# EAGLE board placa_inferior_n (EAGLE 4.09)
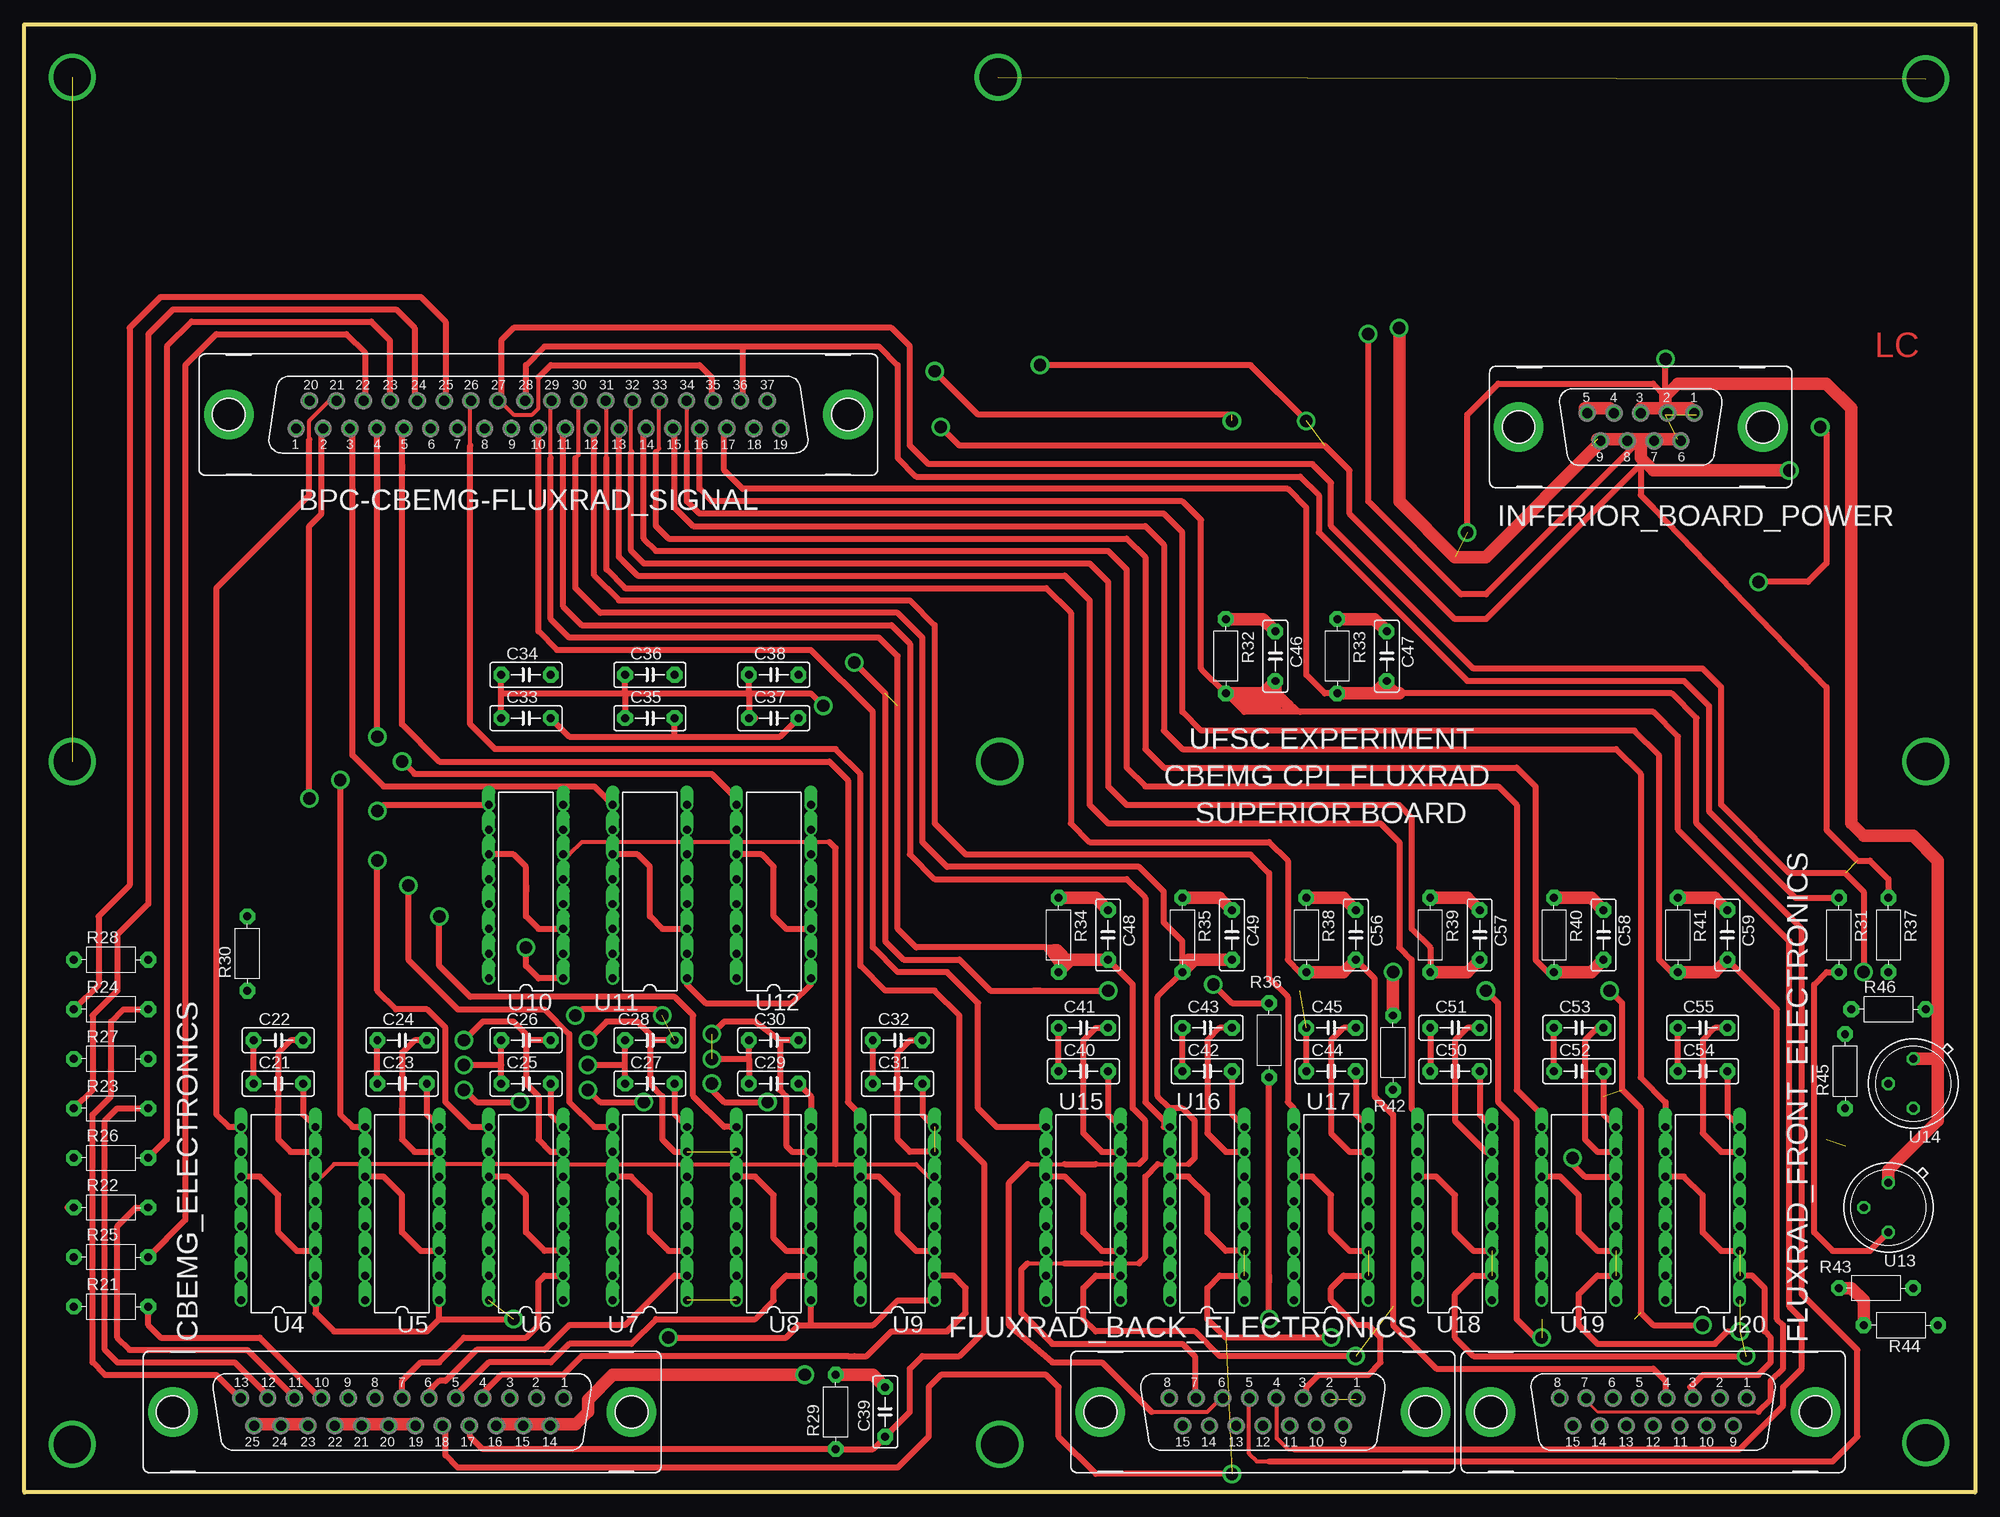
[diagram p0: board, top side]
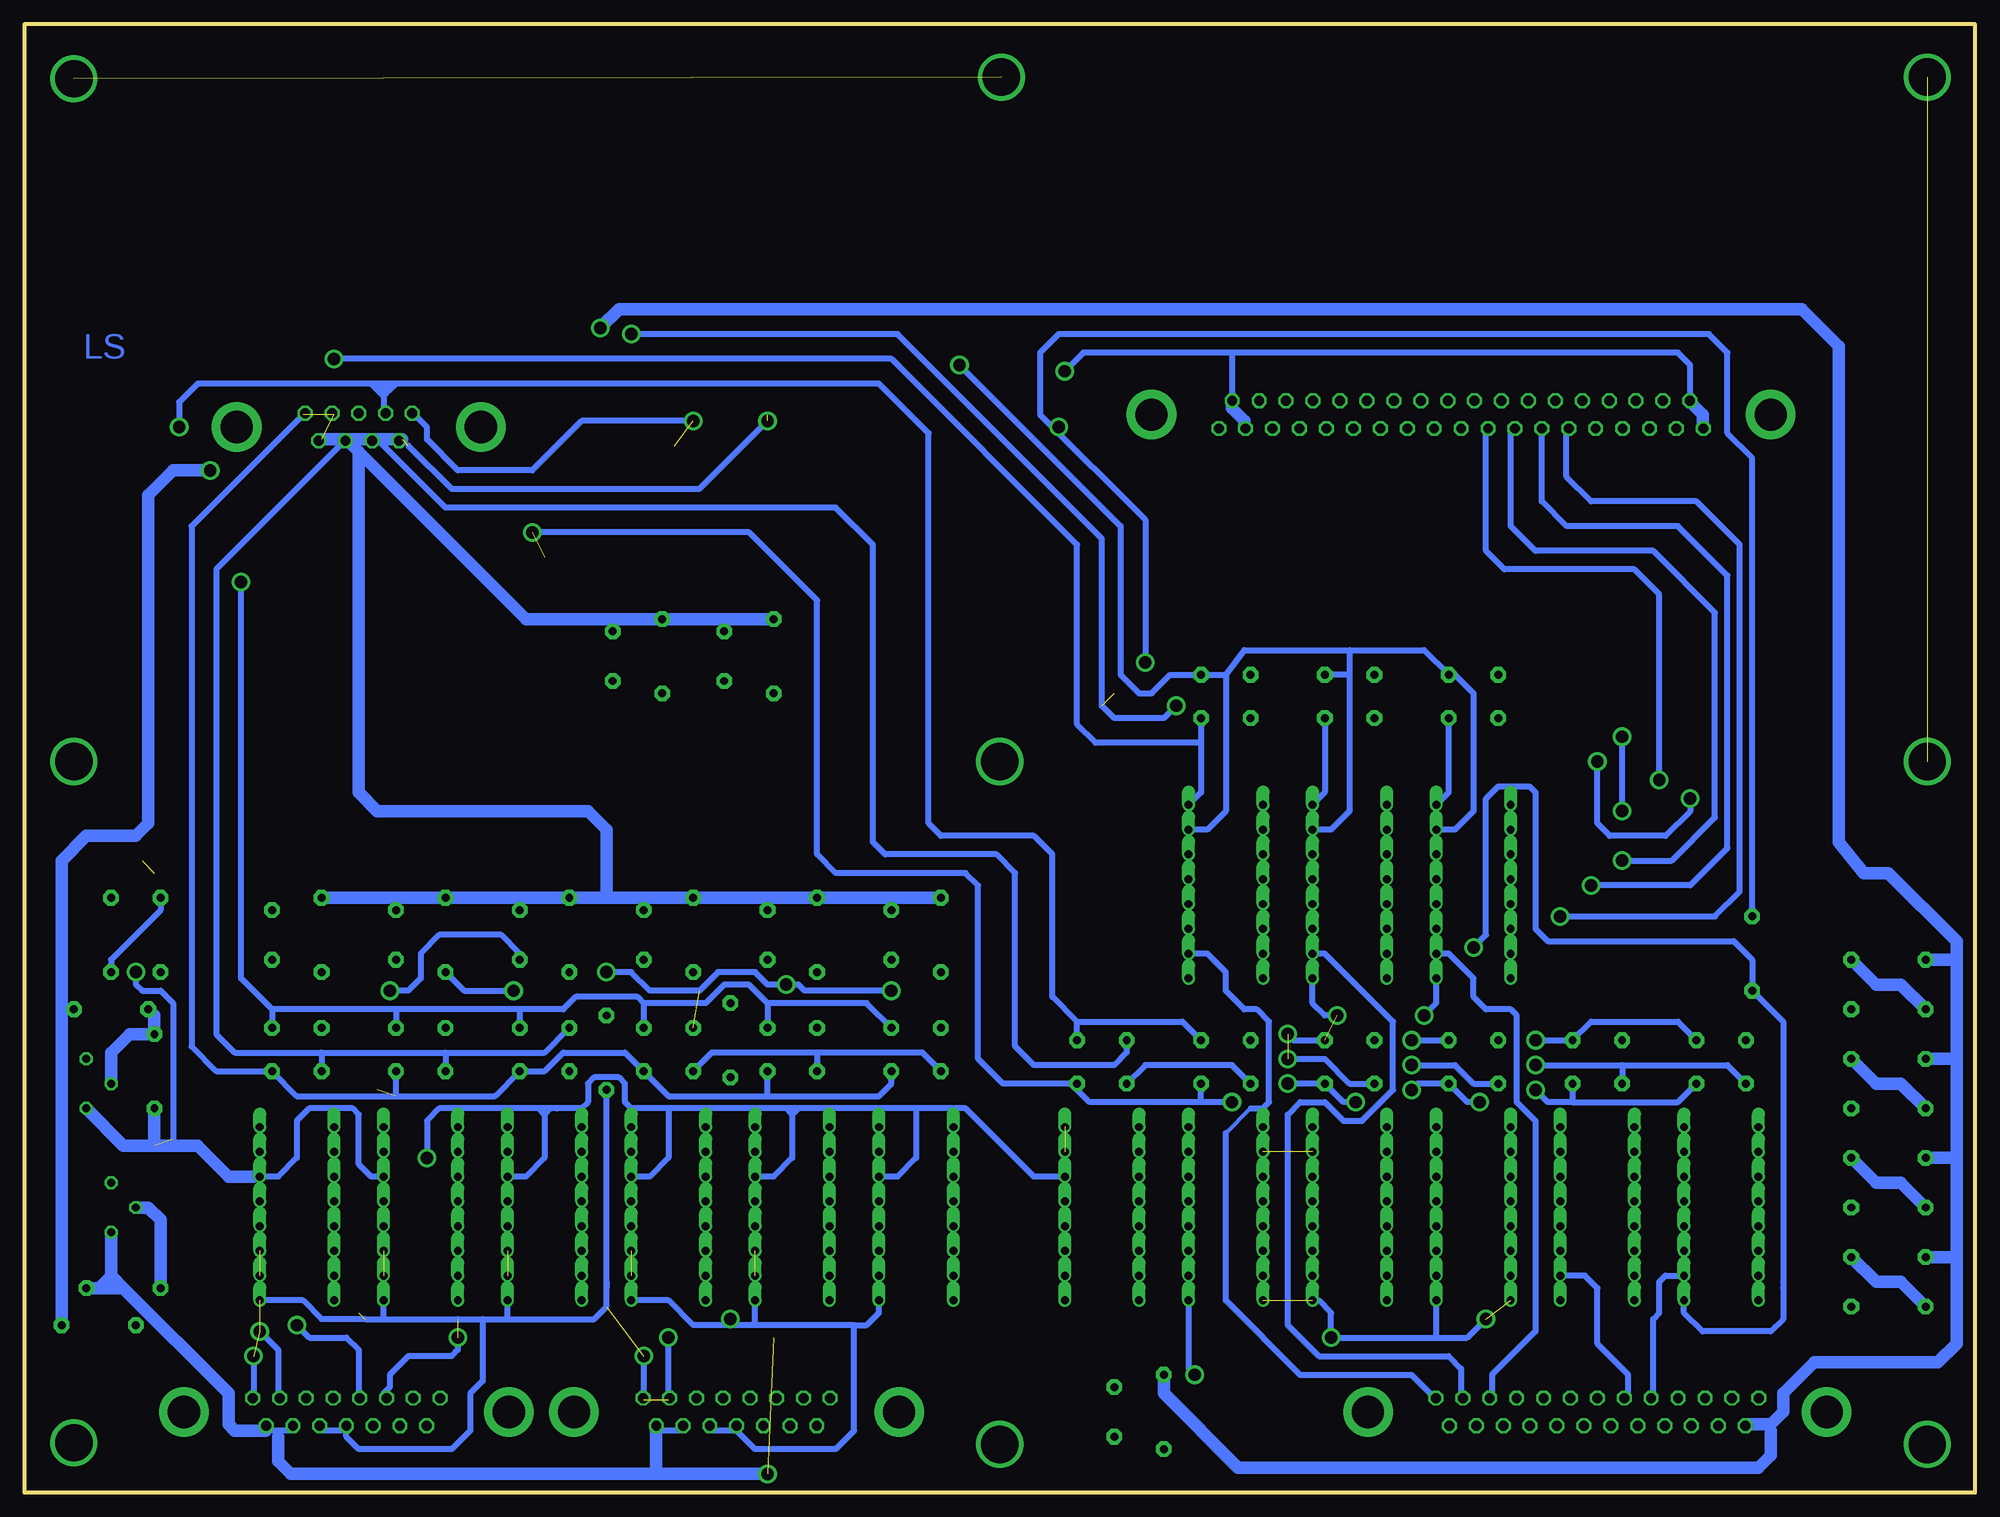
[diagram p1: board, bottom side, seen from below]

Size 200.03 x 150.5 mm. Coordinates in mm from the lower left corner, seen from the top.
Outline: 0,150.5 200.03,150.5 200.03,0 0,0 0,150.5
Copper layers used: Top, Bottom

## Footprints (pad centres in the part's own frame; a part is rotated, then mirrored left to right if it is on the bottom)
F37VP = drill 1.016 octagon: 1 24.841,1.422; 2 22.073,1.422; 3 19.329,1.422; 4 16.561,1.422; 5 13.792,1.422; 6 11.049,1.422; 7 8.28,1.422; 8 5.512,1.422; 9 2.769,1.422; 10 0,1.422; 11 -2.769,1.422; 12 -5.512,1.422; 13 -8.28,1.422; 14 -11.049,1.422; 15 -13.818,1.422; 16 -16.561,1.422; 17 -19.329,1.422; 18 -22.098,1.422; 19 -24.841,1.422; 20 23.47,-1.422; 21 20.701,-1.422; 22 17.932,-1.422; 23 15.189,-1.422; 24 12.421,-1.422; 25 9.652,-1.422; 26 6.909,-1.422; 27 4.14,-1.422; 28 1.372,-1.422; 29 -1.372,-1.422; 30 -4.14,-1.422; 31 -6.909,-1.422; 32 -9.677,-1.422; 33 -12.421,-1.422; 34 -15.189,-1.422; 35 -17.958,-1.422; 36 -20.701,-1.422; 37 -23.47,-1.422 | drill 3.302 pad 5.08 round: G1 -31.75,0; G2 31.75,0
C5B2.5 = drill 0.813 pad 1.6 octagon: 1 -2.54,0; 2 2.54,0
F25VP = drill 1.016 octagon: 1 16.561,1.422; 2 13.792,1.422; 3 11.049,1.422; 4 8.28,1.422; 5 5.512,1.422; 6 2.769,1.422; 7 0,1.422; 8 -2.769,1.422; 9 -5.512,1.422; 10 -8.28,1.422; 11 -11.049,1.422; 12 -13.792,1.422; 13 -16.561,1.422; 14 15.189,-1.422; 15 12.421,-1.422; 16 9.652,-1.422; 17 6.909,-1.422; 18 4.14,-1.422; 19 1.372,-1.422; 20 -1.372,-1.422; 21 -4.14,-1.422; 22 -6.909,-1.422; 23 -9.652,-1.422; 24 -12.421,-1.422; 25 -15.189,-1.422 | drill 3.302 pad 5.08 round: G1 -23.52,0; G2 23.52,0
F15VP = drill 1.016 octagon: 1 9.601,1.422; 2 6.858,1.422; 3 4.115,1.422; 4 1.372,1.422; 5 -1.372,1.422; 6 -4.115,1.422; 7 -6.858,1.422; 8 -9.601,1.422; 9 8.23,-1.422; 10 5.486,-1.422; 11 2.743,-1.422; 12 0,-1.422; 13 -2.743,-1.422; 14 -5.486,-1.422; 15 -8.23,-1.422 | drill 3.302 pad 5.08 round: G1 -16.662,0; G2 16.662,0
F09VP = drill 1.016 octagon: 1 5.486,1.422; 2 2.743,1.422; 3 0,1.422; 4 -2.743,1.422; 5 -5.486,1.422; 6 4.115,-1.422; 7 1.372,-1.422; 8 -1.372,-1.422; 9 -4.115,-1.422 | drill 3.302 pad 5.08 round: G1 -12.522,0; G2 12.522,0
R-7,5 = drill 0.813 pad 1.6 octagon: 1 -3.81,0; 2 3.81,0
DIL16 = drill 0.813 offset: 1 -8.89,-3.81; 2 -6.35,-3.81; 3 -3.81,-3.81; 4 -1.27,-3.81; 5 1.27,-3.81; 6 3.81,-3.81; 7 6.35,-3.81; 8 8.89,-3.81; 9 8.89,3.81; 10 6.35,3.81; 11 3.81,3.81; 12 1.27,3.81; 13 -1.27,3.81; 14 -3.81,3.81; 15 -6.35,3.81; 16 -8.89,3.81
TO39 = drill 0.813 octagon: 1 0,-2.54; 2 2.54,0; 3 0,2.54

## Placement (x,y rotation side)
BPC-CBEMG-FLUXRAD_SIGNAL  [F37VP]  52.7,110.49 180 top
C21  [C5B2.5]  26.03,41.91 0 top
C22  [C5B2.5]  26.03,46.36 0 top
C23  [C5B2.5]  38.73,41.91 0 top
C24  [C5B2.5]  38.73,46.36 0 top
C25  [C5B2.5]  51.44,41.91 0 top
C26  [C5B2.5]  51.44,46.36 0 top
C27  [C5B2.5]  64.13,41.91 0 top
C28  [C5B2.5]  64.13,46.36 0 top
C29  [C5B2.5]  76.84,41.91 0 top
C30  [C5B2.5]  76.84,46.36 0 top
C31  [C5B2.5]  89.53,41.91 0 top
C32  [C5B2.5]  89.53,46.36 0 top
C33  [C5B2.5]  51.44,79.37 0 top
C34  [C5B2.5]  51.44,83.82 0 top
C35  [C5B2.5]  64.13,79.37 0 top
C36  [C5B2.5]  64.13,83.82 0 top
C37  [C5B2.5]  76.84,79.37 0 top
C38  [C5B2.5]  76.84,83.82 0 top
C39  [C5B2.5]  88.26,8.25 90 top
C40  [C5B2.5]  108.59,43.18 0 top
C41  [C5B2.5]  108.59,47.62 0 top
C42  [C5B2.5]  121.28,43.18 0 top
C43  [C5B2.5]  121.28,47.62 0 top
C44  [C5B2.5]  133.98,43.18 0 top
C45  [C5B2.5]  133.98,47.62 0 top
C46  [C5B2.5]  128.27,85.73 270 top
C47  [C5B2.5]  139.7,85.73 270 top
C48  [C5B2.5]  111.12,57.15 270 top
C49  [C5B2.5]  123.82,57.15 270 top
C50  [C5B2.5]  146.69,43.18 0 top
C51  [C5B2.5]  146.69,47.62 0 top
C52  [C5B2.5]  159.38,43.18 0 top
C53  [C5B2.5]  159.38,47.62 0 top
C54  [C5B2.5]  172.09,43.18 0 top
C55  [C5B2.5]  172.09,47.62 0 top
C56  [C5B2.5]  136.53,57.15 270 top
C57  [C5B2.5]  149.22,57.15 270 top
C58  [C5B2.5]  161.92,57.15 270 top
C59  [C5B2.5]  174.62,57.15 270 top
CBEMG_ELECTRONICS  [F25VP]  38.73,8.25 0 top
FLUXRAD_BACK_ELECTRONICS  [F15VP]  127,8.25 0 top
FLUXRAD_FRONT_ELECTRONICS  [F15VP]  167,8.25 0 top
INFERIOR_BOARD_POWER  [F09VP]  165.73,109.22 0 top
R21  [R-7,5]  8.89,19.05 0 top
R22  [R-7,5]  8.89,29.21 0 top
R23  [R-7,5]  8.89,39.37 0 top
R24  [R-7,5]  8.89,49.53 0 top
R25  [R-7,5]  8.89,24.13 0 top
R26  [R-7,5]  8.89,34.29 0 top
R27  [R-7,5]  8.89,44.45 0 top
R28  [R-7,5]  8.89,54.61 0 top
R29  [R-7,5]  83.19,8.25 90 top
R30  [R-7,5]  22.86,55.24 90 top
R31  [R-7,5]  186.06,57.15 270 top
R32  [R-7,5]  123.19,85.73 270 top
R33  [R-7,5]  134.62,85.73 270 top
R34  [R-7,5]  106.04,57.15 270 top
R35  [R-7,5]  118.75,57.15 270 top
R36  [R-7,5]  127.63,46.36 270 top
R37  [R-7,5]  191.14,57.15 270 top
R38  [R-7,5]  131.44,57.15 270 top
R39  [R-7,5]  144.15,57.15 270 top
R40  [R-7,5]  156.84,57.15 270 top
R41  [R-7,5]  169.54,57.15 270 top
R42  [R-7,5]  140.34,45.08 270 top
R43  [R-7,5]  189.86,20.95 180 top
R44  [R-7,5]  192.41,17.14 0 top
R45  [R-7,5]  186.69,43.18 90 top
R46  [R-7,5]  191.14,49.53 0 top
U4  [DIL16]  26.03,28.58 90 top
U5  [DIL16]  38.73,28.58 90 top
U6  [DIL16]  51.44,28.58 90 top
U7  [DIL16]  64.13,28.58 90 top
U8  [DIL16]  76.84,28.58 90 top
U9  [DIL16]  89.53,28.58 90 top
U10  [DIL16]  51.44,61.59 90 top
U11  [DIL16]  64.13,61.59 90 top
U12  [DIL16]  76.84,61.59 90 top
U13  [TO39]  191.14,29.21 180 top
U14  [TO39]  193.67,41.91 180 top
U15  [DIL16]  108.59,28.58 90 top
U16  [DIL16]  121.28,28.58 90 top
U17  [DIL16]  133.98,28.58 90 top
U18  [DIL16]  146.69,28.58 90 top
U19  [DIL16]  159.38,28.58 90 top
U20  [DIL16]  172.09,28.58 90 top

## Library data of the parts
BPC-CBEMG-FLUXRAD_SIGNAL CBEMG_ELECTRONICS FLUXRAD_BACK_ELECTRONICS FLUXRAD_FRONT_ELECTRONICS INFERIOR_BOARD_POWER = con-subd
C21-C59 = capacitor-wima
R21-R46 = discrete
U4-U12 U15-U20 = dil
U13 U14 = linear

## Nets
S$1: U6.1 U7.1 U8.1 U8.16 U9.1
S$3: R25.1 R26.1 R27.1 R28.1
S$4: R23.1 R27.2
S$6: R21.1 R25.2
S$7: R22.1 R26.2
S$8: R24.2
S$10: C39.1 R29.1
S$11: R21.2
S$12: R22.2
S$13: U5.2
S$14: U4.3 U4.11
S$15: U5.3 U5.11
S$17: U5.9 U5.10
S$18: U4.2
S$19: U6.3 U6.11
S$20: U7.3 U7.11
S$21: U8.3 U8.11
S$22: U6.9 U6.10
S$23: C33.2 C35.2 C37.2 U10.8 U11.8 U12.8
S$24: C33.1 C34.1 C35.1 C36.1 C38.1 C40.1 C41.1 C42.1 C43.1 C44.1 C45.1 R30.2 R36.1 R42.1
S$26: U9.3 U9.11
S$27: U12.9 U12.10
S$29: U10.3 U10.11
S$32: R43.2 R44.1 U13.2
S$35: R31.1 R37.2
S$37: U10.9 U10.10
S$38: R31.2
S$39: C58.2 R40.2
S$41: U6.2
S$42: U7.2
S$43: U8.2
S$44: U9.2
S$46: U11.2
S$47: U10.2
S$48: U11.3 U11.11
S$49: U12.3 U12.11
S$56: C57.2 R39.2
S$57: C21.1 C21.2 C22.1 C22.2 C23.1 C23.2 C24.1 C24.2 C25.1 C25.2 C26.1 C26.2 C27.1 C27.2 C28.1 C28.2 C29.1 C29.2 C30.1 C30.2 C31.1 C31.2 C32.1 C32.2 C34.2 C36.2 C38.2 C40.2 C42.2 C44.2 C50.2 C52.2 C54.2 R30.1 R37.1 R42.2 R45.1 U4.1 U4.7 U4.8 U5.1 U5.7 U5.8 U6.7 U6.8 U6.16 U7.7 U7.8 U8.7 U8.8 U8.9 U8.10 U9.7 U9.8 U10.1 U10.7 U11.1 U11.7 U12.1 U12.7 U15.2 U15.8 U16.2 U16.3 U16.8 U16.11 U17.8 U18.1 U18.8 U19.1 U19.8 U20.1 U20.8
S$58: R24.1 R28.2
S$59: U9.9 U9.10
S$60: U11.9 U11.10
S$61: U20.2 U20.3 U20.11
S$62: U12.2
S$63: U16.9 U16.10
S$64: C49.2 R35.2
S$65: U17.9 U17.10
S$66: U4.9 U4.10
S$67: U7.9 U7.10
S$68: C48.2 R34.2
S$70: R45.2 R46.1 U14.2
S$72: U17.2 U17.3 U17.11
S$73: C49.1 R35.1
S$74: C39.2 R29.2
S$78: U15.3 U15.11
S$81: U15.9 U15.10
S$82: R36.2 U15.1 U16.1 U17.1
S$84: U5.6 U6.6 U7.6 U8.6 U9.6 U11.6 U12.6 U15.6 U16.6 U17.6 U18.6
S$86: R43.1
S$95: C41.2 C43.2 C45.2 C51.2 C53.2 C55.2 U15.7 U16.7 U17.7 U19.7 U20.7
S$96: U18.9 U18.10
S$97: U19.6 U20.6
S$99: C56.2 R38.2
S$101: U19.9 U19.10
S$108: U20.9 U20.10
S$109: C46.2 R32.2
S$110: C59.2 R41.2
S$113: C46.1 C47.1 C48.1 C50.1 C51.1 C52.1 C53.1 C54.1 C55.1 C59.1 R32.1 R33.1 R34.1 R41.1
S$117: C47.2 R33.2
S$118: C56.1 R38.1
S$119: C57.1 R39.1
S$120: C58.1 R40.1
S$122: U18.2 U18.3 U18.11
S$123: U19.2 U19.3 U19.11

## Tracks (layer width: path | path; a pad name or v marks a point on that pad's centre or on a via)
S$1  (via drill 1.27)  (1 unrouted)
  Top 0.61: U9.1 89.53,19.69 87,17.14 80.65,17.14 | 80.65,17.14 U8.1 | 80.65,17.14 79.38,17.14 78.1,15.88 v66.04,15.88
  Bottom 0.61: U7.1 67.31,19.69 66.04,18.41 v66.04,15.88 55.24,15.88 | v80.01,12.06 80.65,12.7 U8.1 | 50.16,17.78 52.07,15.88 55.24,15.88 | 55.24,15.88 U6.1
S$2
  Top 0.61: 31.11,109.22 30.48,108.58 30.48,100.33 29.21,99.06 29.21,71.12
S$3
  Bottom 1.27: 23.49,6.98 20.95,6.98 19.69,8.25 19.69,10.16 16.51,13.33 3.81,13.33 1.91,15.24 1.91,24.13 | 1.91,24.13 R25.1 | 1.91,34.29 1.91,24.13 | 1.91,34.29 R26.1 | 1.91,44.45 1.91,34.29 | 1.91,44.45 R27.1 | 1.91,54.61 1.91,44.45 | 1.91,54.61 R28.1 | 140.97,119.38 139.06,121.29 17.78,121.29 13.97,117.48 13.97,66.67 11.43,63.5 8.89,63.5 1.91,56.52 1.91,54.61
S$4
  Top 0.61: 40,112.39 40,119.38 38.1,121.29 15.24,121.29 12.7,118.74 12.7,60.33 9.52,57.15 9.52,51.43 6.98,48.89 6.98,41.27 R23.1
  Bottom 1.27: R27.2 10.16,41.91 7.62,41.91 R23.1
S$5
  Top 0.61: 155.57,15.88 154.94,15.88 153.03,17.78 153.03,38.1 151.13,40.01 151.13,50.17 149.86,51.43
S$6
  Top 0.61: 34.92,112.39 34.92,116.84 33.02,118.74 19.69,118.74 16.51,115.57 16.51,27.94 R25.2
  Bottom 1.27: R25.2 10.16,21.59 7.62,21.59 R21.1
S$7
  Top 0.61: 14.6,46.99 14.6,46.36 | 37.47,112.39 37.47,118.11 35.56,120.02 17.14,120.02 14.6,117.48 14.6,46.99 | R22.1 4.44,29.21 | 14.6,46.99 14.6,36.2 R26.2
  Bottom 1.27: R26.2 10.16,31.75 7.62,31.75 R22.1
S$8
  Top 0.61: R24.2 10.16,49.53 8.89,48.26 8.89,40.64 6.98,38.73 6.98,13.33 8.25,12.06 19.69,12.06 22.22,9.52
S$9
  Top 0.61: 12.06,39.37 9.52,39.37 8.25,38.1 8.25,14.61 9.52,13.33 21.59,13.33 24.77,10.16
S$10
  Top 0.406: 45.72,107.32 45.72,111.76
  Top 0.61: 45.72,6.98 45.72,5.72 46.99,4.44 R29.1 87,4.44 C39.1 90.81,8.25 90.81,12.7 92.07,13.97 95.88,13.97 98.42,16.51 98.42,33.65 95.88,36.2 95.88,48.89 93.34,51.43 88.26,51.43 85.72,53.98 85.72,73.66 83.19,76.2 48.26,76.2 45.72,78.74 45.72,107.32
S$11
  Top 0.61: R21.2 12.7,17.14 13.97,15.88 24.13,15.88 30.48,9.52
S$12
  Top 0.61: R22.2 11.43,29.21 9.52,27.3 9.52,15.88 10.8,14.61 22.86,14.61 27.94,9.52
S$13
  Bottom 0.61: 36.19,9.52 35.56,10.16 35.56,12.06 38.73,15.24 38.73,20.95 40,22.23 U5.2
S$14
  Top 0.61: U4.3 27.94,24.77 26.03,26.67 26.03,30.48 24.13,32.39 U4.11
S$15
  Top 0.61: U5.3 40.64,24.77 38.73,26.67 38.73,30.48 36.83,32.39 U5.11
S$16
  Top 1.27: 48.26,6.98 56.52,6.98 57.78,8.25 57.78,9.52 60.32,12.06 80.01,12.06
S$17  (via drill 1.27)
  Top 0.61: U5.10 U5.9 33.66,37.46 32.38,38.73 v32.38,73.02
  Bottom 0.61: v32.38,73.02 32.38,92.08 34.92,94.61 48.26,94.61 50.16,96.52 50.16,109.22
S$18
  Bottom 0.61: 33.02,9.52 33.02,17.78 32.38,18.41 32.38,21.59 31.75,22.23 U4.2
S$19
  Top 0.61: U6.11 49.53,32.39 51.44,30.48 51.44,26.67 53.34,24.77 U6.3
S$20
  Top 0.61: U7.11 62.23,32.39 64.13,30.48 64.13,26.67 66.04,24.77 U7.3
S$21
  Top 0.61: U8.11 74.93,32.39 76.84,30.48 76.84,26.04 78.1,24.77 U8.3
S$22
  Top 0.61: U6.10 U6.9
S$23
  Top 0.61: C33.2 55.88,77.47 66.67,77.47 | 66.67,77.47 C35.2 | 66.67,77.47 77.47,77.47 C37.2
  Bottom 0.61: C33.2 53.97,71.76 U10.8 | C35.2 66.67,71.76 U11.8 | C37.2 79.38,76.83 | 79.38,76.83 79.38,71.76 U12.8 | 79.38,76.83 90.17,76.83 92.07,78.74 92.07,97.15 111.12,116.2 168.28,116.2
S$24  (via drill 1.27)  (2 unrouted)
  Top 0.61: C40.1 C41.1 | C42.1 C43.1 | C44.1 C45.1 | R36.1 123.82,50.17 v121.92,52.07 | 104.14,51.43 103.5,51.43 | 104.14,51.43 v111.12,51.43 | 104.14,51.43 99.06,51.43 95.88,54.61 90.17,54.61 88.26,56.52 88.26,81.92 v85.09,85.09 | v81.91,80.64 80.65,81.92 74.29,81.92 | 74.93,79.37 74.29,80.01 74.29,81.92 | 74.29,81.92 C38.1 | 61.59,81.92 C35.1 | 61.59,81.92 C36.1 | 61.59,81.92 74.29,81.92 | 48.89,81.92 C34.1 | 48.89,81.92 61.59,81.92 | C33.1 48.89,81.92
  Top 1.27: v140.34,53.34 R42.1
  Bottom 0.61: C40.1 107.95,45.08 118.75,45.08 | 118.75,45.08 C42.1 | 121.28,45.08 121.92,45.08 | 118.75,45.08 121.28,45.08 | 121.28,45.08 129.54,45.08 C44.1 | v140.34,53.34 137.79,53.34 135.89,51.43 130.81,51.43 128.91,53.34 125.09,53.34 123.82,52.07 v121.92,52.07 120.65,52.07 120.01,51.43 v111.12,51.43 | 137.79,118.74 110.49,118.74 89.53,97.79 89.53,80.64 88.26,79.37 83.19,79.37 v81.91,80.64 | v85.09,85.09 85.09,99.7 95.88,110.49 95.88,116.84 93.98,118.74 27.3,118.74 25.4,116.84 25.4,108.58 22.86,106.05 R30.2
S$25
  Bottom 0.61: 174.62,49.53 177.8,52.7 177.8,93.34
S$26
  Top 0.61: U9.11 87.63,32.39 89.53,30.48 89.53,26.67 91.44,24.77 U9.3
S$27  (via drill 1.27 pad 1.68)
  Top 0.61: U12.10 U12.9 73.03,71.12 70.48,73.66 40,73.66 v38.73,74.93
  Bottom 0.61: v38.73,74.93 38.73,68.58 37.47,67.31 31.75,67.31 29.21,69.85 v29.21,71.12
S$28  (via drill 1.27)
  Top 0.61: v36.19,64.77 36.19,51.43 38.1,49.53 41.27,49.53 43.18,47.62 43.18,40.01 45.72,37.46 46.99,37.46
  Bottom 0.61: v36.19,64.77 31.11,64.77 26.67,69.21 26.67,90.17 33.02,96.52 45.08,96.52 47.62,99.06 47.62,108.58 46.99,109.22
S$29
  Top 0.61: U10.3 52.7,57.79 51.44,59.05 51.44,62.23 | U10.11 50.16,65.4 51.44,64.14 51.44,62.23 | 51.44,62.23 51.44,61.59
S$30
  Bottom 1.27: 161.29,107.95 169.54,107.95
S$31  (via drill 3.81)  (1 unrouted)
  other vias: 4.92,74.93 4.92,145.1
S$32
  Top 1.27: R43.2 187.33,20.95 188.59,19.69 R44.1
  Bottom 1.27: U13.2 187.33,29.21 186.06,27.94 R43.2
S$34  (via drill 3.81)  (1 unrouted)
  other vias: 99.85,145.1 194.95,144.94
S$35
  Top 0.61: 73.66,117.48 73.66,112.39 | 73.66,117.48 87.63,117.48 89.53,115.57 89.53,106.05 91.44,104.14 130.81,104.14 132.72,102.23 132.72,98.42 147.95,83.18 170.18,83.18 172.72,80.64 172.72,69.85 181.61,60.96 R31.1 | 73.66,117.48 53.34,117.48 51.44,115.57 51.44,112.39
  Bottom 0.61: R31.1 186.06,59.69 191.14,54.61 R37.2
S$36
  Top 0.406: 48.89,111.76 50.16,110.49 52.07,110.49 52.7,111.12 52.7,114.3
  Top 0.61: 52.7,114.3 53.97,115.57 69.22,115.57 70.48,114.3 70.48,112.39
S$37  (via drill 1.27 pad 1.68)
  Top 0.61: 36.19,104.14 36.19,102.87 | 36.19,104.14 36.19,109.22 | v36.19,77.47 36.19,104.14 | U10.10 U10.9 36.83,70.48 v36.19,69.85
  Bottom 0.61: v36.19,69.85 v36.19,77.47
S$38
  Top 0.61: 191.14,26.67 189.23,24.77 185.42,24.77 183.51,26.67 183.51,52.07 184.78,53.34 R31.2
S$39  (via drill 1.27 pad 1.68)
  Top 0.406: 65.09,111.44 65.09,107 64.77,106.68
  Top 0.61: R40.2 156.21,53.34 154.94,54.61 154.94,72.39 153.03,74.3 116.84,74.3 114.94,76.2 114.94,95.89 113.03,97.79 66.04,97.79 64.77,99.06 64.77,106.68
  Top 1.27: C58.2 160.66,53.34 R40.2
  Bottom 0.61: v149.86,51.43 154.94,51.43 R40.2
S$40
  Top 1.27: 160.02,111.12 162.56,111.12
S$41
  Top 0.61: 38.73,10.16 38.73,11.43 40.64,13.33 42.55,13.33 45.08,15.88 51.44,15.88 52.7,17.14 52.7,21.59 53.34,22.23 U6.2
S$42
  Top 0.61: 41.27,9.52 41.27,10.16 42.55,11.43 43.18,11.43 46.35,14.61 53.34,14.61 55.88,17.14 61.59,17.14 66.67,22.23 U7.2
S$43
  Top 0.61: 44.45,9.52 44.45,10.16 47.62,13.33 53.97,13.33 55.88,15.24 62.23,15.24 64.77,17.78 74.93,17.78 76.84,19.69 76.84,20.95 78.1,22.23 U8.2
S$44
  Top 0.61: 46.99,9.52 46.99,10.16 48.89,12.06 55.24,12.06 57.15,13.97 84.45,13.97 | 84.45,13.97 85.09,13.97 | 84.45,13.97 86.36,13.97 88.9,16.51 94.62,16.51 96.52,18.41 96.52,20.95 95.25,22.23 U9.2
S$45  (via drill 3.81)
  other vias: 194.95,74.93
S$46
  Bottom 0.61: 52.7,9.52 52.7,12.7 53.97,13.97 67.31,13.97 70.48,17.14 70.48,38.73 69.22,40.01 66.67,40.01 64.77,38.1 62.87,38.1 59.69,41.27 59.69,48.26 66.67,55.24 U11.2
S$47
  Bottom 0.61: 49.53,9.52 49.53,12.06 45.08,16.51 45.08,38.1 46.99,40.01 46.99,48.89 47.62,49.53 50.16,49.53 51.44,50.8 51.44,52.7 53.97,55.24 U10.2
S$48
  Top 0.61: U11.11 62.87,65.4 64.13,64.14 64.13,59.05 65.41,57.79 U11.3
S$49
  Top 0.61: U12.11 75.56,65.4 76.84,64.14 76.84,59.05 78.1,57.79 U12.3
S$50  (via drill 3.81)
  other vias: 194.95,5.08
S$51  (via drill 3.81)
  other vias: 100.01,74.93
S$52  (via drill 3.81)
  other vias: 100.01,4.92
S$53  (via drill 3.81)
  other vias: 4.92,4.92
S$54
  Bottom 1.27: 29.21,111.76 27.94,110.49 27.94,109.22
S$55
  Bottom 0.61: 93.34,114.93 91.44,116.84 76.2,116.84 | 76.2,116.84 76.2,111.76 | 76.2,116.84 30.48,116.84 29.21,115.57 29.21,112.39
  Bottom 1.27: 74.93,109.22 74.93,109.86 76.2,111.12 76.2,111.76
S$56  (via drill 1.27 pad 1.68)
  Top 0.406: 62.23,106.68 62.23,111.76
  Top 0.61: C57.2 149.22,53.98 | R39.2 144.15,55.88 142.24,57.79 142.24,69.21 140.97,70.48 113.03,70.48 111.12,72.39 111.12,93.34 109.22,95.25 63.5,95.25 62.23,96.52 62.23,106.68
  Top 1.27: C57.2 147.95,53.34 R39.2
  Bottom 0.61: v162.56,51.43 160.66,51.43 159.38,52.7 159.38,55.24 157.48,57.15 151.13,57.15 149.22,55.24 C57.2
S$57  (via drill 1.27, 1.27 pad 1.42)  (22 unrouted)
  Top 0.61: 43.18,6.35 43.18,3.81 44.45,2.54 89.53,2.54 92.71,5.72 92.71,10.8 93.98,12.06 104.78,12.06 106.04,10.8 106.04,5.72 109.85,1.91 v123.82,1.91 | 42.55,17.78 U5.1 | 42.55,17.78 v50.16,17.78 | U16.11 119.38,32.39 121.28,30.48 121.28,26.67 123.19,24.77 U16.3 | 42.55,17.78 41.27,16.51 31.75,16.51 29.84,18.41 U4.1 | U16.2 122.56,22.23 121.28,20.95 121.28,19.69 | 121.28,19.69 121.28,20.32 | U15.2 109.85,22.23 108.59,20.95 108.59,17.78 109.85,16.51 120.01,16.51 122.56,13.97 v136.53,13.97 | 121.28,19.69 121.28,17.78 123.19,15.88 v133.98,15.88 | U4.7 27.3,34.92 26.03,36.2 26.03,38.73 | 26.03,38.73 26.03,39.37 | 48.89,112.39 48.89,118.11 50.16,119.38 88.9,119.38 90.81,117.48 90.81,107.32 92.71,105.41 132.08,105.41 133.98,103.51 133.98,99.06 148.59,84.45 172.09,84.45 173.99,82.55 173.99,70.48 180.97,63.5 186.69,63.5 188.59,61.59 v188.59,53.34 | U15.8 111.12,38.73 C40.2 | 26.03,38.73 26.03,45.08 27.3,46.36 C22.2 | U5.7 40,34.92 38.73,36.2 38.73,38.73 | U16.8 123.82,38.73 C42.2 | 38.73,38.73 38.73,39.37 | v42.55,59.05 42.55,53.98 45.72,50.8 66.67,50.8 68.58,48.89 68.58,40.64 71.75,37.46 U8.9 | 38.73,38.73 38.73,45.08 40,46.36 C24.2 | C21.1 C22.1 | U17.8 136.53,38.73 C44.2 | C23.1 C24.1 | U6.7 53.97,34.92 52.7,36.2 52.7,40.64 51.44,41.91 51.44,46.36 | v45.08,46.36 46.99,48.26 50.16,48.26 51.44,46.99 51.44,46.36 | v172.09,17.14 167,17.14 165.73,18.41 165.73,39.37 163.83,41.27 163.83,50.17 162.56,51.43 | U8.9 72.39,37.46 | v51.44,55.88 51.44,53.98 52.7,52.7 U10.1 | U12.1 80.65,52.07 78.74,50.17 69.85,50.17 67.94,52.07 U11.1 | 48.89,43.82 C26.1 | 48.89,43.82 v45.08,43.82 | U18.8 149.22,38.73 C50.2
  Top 0.61: U19.8 161.92,38.73 C52.2 | C25.1 48.89,43.82 | U8.10 U8.9 | v177.8,93.34 182.88,93.34 184.78,95.25 184.78,108.58 v184.15,109.22 | C26.2 51.44,46.36 | v104.14,115.57 125.73,115.57 v131.44,109.86 | R37.1 191.14,62.86 189.23,64.77 187.96,64.77 184.78,67.95 184.78,82.55 167,100.96 165.73,102.23 165.73,105.41 | U7.7 66.67,34.92 65.41,36.2 65.41,40.64 64.13,41.91 64.13,46.36 | v57.78,46.36 59.69,48.26 62.87,48.26 64.13,46.99 64.13,46.36 | C31.1 C32.1 | U20.8 174.62,38.73 C54.2 | v93.98,109.22 95.88,107.32 133.35,107.32 135.89,104.77 135.89,100.33 146.69,89.54 149.86,89.54 165.73,105.41 | 61.59,43.82 C28.1 | 61.59,43.82 v57.78,43.82 | v56.52,48.89 57.15,49.53 64.77,49.53 v65.41,48.89 | C27.1 61.59,43.82 | v93.34,114.93 97.79,110.49 123.82,110.49 | C28.2 64.13,46.36 | 74.29,44.45 C29.1 | 74.29,44.45 C30.1 | v137.79,118.74 137.79,101.6 147.32,92.08 149.86,92.08 165.73,107.95 | U8.7 78.74,34.92 78.1,35.56 78.1,40.64 77.47,41.27 77.47,46.36 | v70.48,44.45 74.29,44.45 | 168.28,110.49 v168.28,116.2 | 165.73,106.05 165.73,105.41 | v70.48,46.99 71.75,48.26 74.93,48.26 77.47,46.36 | 168.28,112.39 167,113.67 151.13,113.67 147.95,110.49 v147.95,98.42 | C30.2 77.47,46.36 | C32.2 90.81,46.36 89.53,45.08 89.53,36.2 90.81,34.92 U9.7 | U9.8 92.07,38.73 C31.2 | U8.8 80.65,40.64 C29.2 | v76.2,40.01 71.75,40.01 70.48,41.27 v70.48,41.91 | U7.8 66.67,38.73 C27.2 | v63.5,40.01 59.06,40.01 v57.78,41.27 | U6.8 53.97,38.73 C25.2 | v50.8,40.01 46.35,40.01 v45.08,41.27 | U4.8 28.58,38.73 C21.2 | C23.2 41.27,38.73 U5.8
  Top 1.27: 191.14,31.75 191.14,33.02 196.22,38.1 196.22,44.45 | 196.22,44.45 193.67,44.45 | 196.22,44.45 196.22,64.77 193.67,67.31 188.59,67.31 187.33,68.58 187.33,111.12 184.78,113.67 169.54,113.67 168.28,112.39 168.28,111.12 | v180.97,104.77 167,104.77 165.73,106.05 165.73,107.95 | 168.28,111.12 165.73,111.12 | 168.28,111.12 170.81,111.12 | 165.73,107.95 169.54,107.95 | 161.92,107.95 165.73,107.95 | 161.92,107.95 161.29,107.95 | 161.92,107.95 149.86,95.89 146.69,95.89 140.97,101.6 v140.97,119.38
  Bottom 0.61: U4.1 29.84,18.41 27.94,16.51 20.95,16.51 19.69,17.78 19.69,21.59 | U10.7 53.34,67.95 51.44,69.85 51.44,81.92 53.34,83.82 C34.2 56.52,86.36 64.13,86.36 | 19.69,21.59 19.69,20.95 | 41.91,108.58 41.91,104.14 39.37,101.6 28.58,101.6 24.13,97.15 24.13,61.59 26.67,59.05 v42.55,59.05 | 19.69,21.59 19.69,48.26 R30.1 22.86,54.61 24.77,56.52 43.81,56.52 45.08,57.79 45.08,71.76 45.72,72.39 48.89,72.39 50.16,71.12 50.16,57.15 v51.44,55.88 | 169.54,6.35 167.64,6.35 167,6.98 167,5.72 165.73,4.44 156.21,4.44 154.31,6.35 154.31,10.16 153.03,11.43 153.03,17.78 | 133.98,9.52 v133.98,15.88 | U11.7 66.04,67.95 64.13,69.85 64.13,83.82 | 163.19,10.16 162.56,10.8 162.56,12.06 160.66,13.97 156.21,13.97 155.57,14.61 v155.57,15.88 | 163.83,107.95 156.84,100.96 116.84,100.96 113.03,97.15 113.03,66.67 111.76,65.4 100.33,65.4 98.42,63.5 98.42,45.72 96.52,43.82 88.26,43.82 87,45.08 C32.1 | v136.53,13.97 136.53,9.52 | 140.34,21.59 140.34,20.95 | 140.34,21.59 R42.2 | 64.13,83.82 C36.2 | U12.7 78.74,67.95 76.84,69.85 76.84,83.82 | 64.13,86.36 64.13,83.82 | C40.2 111.12,41.91 112.4,40.64 123.82,40.64 | 140.34,21.59 140.34,19.05 141.6,17.78 150.5,17.78 | C22.2 30.48,48.26 39.37,48.26 C24.2 v45.08,46.36 | v176.53,13.97 176.53,9.52 | 173.99,10.16 173.99,14.61 v175.9,16.51 | 64.13,86.36 74.93,86.36 76.84,83.82 | 123.82,40.64 C42.2 | 150.5,17.78 U18.1 | 165.73,9.52 165.73,14.61 167,15.88 170.81,15.88 v172.09,17.14 | 153.03,17.78 150.5,17.78 | 123.82,40.64 133.98,40.64 C44.2 138.43,45.08 144.78,45.08 146.69,43.18 C50.2 151.76,40.64 161.92,40.64 | 76.84,83.82 C38.2 82.55,83.82 84.45,81.92 85.72,81.92 87.63,83.82 87.63,99.06 v104.14,115.57
  Bottom 0.61: 153.03,17.78 155.57,17.78 163.19,17.78 | U20.1 171.45,19.69 169.54,17.78 165.1,17.78 163.19,17.78 | C21.1 25.4,43.82 36.19,43.82 | 36.19,43.82 C23.1 | 163.19,17.78 U19.1 | 184.78,36.2 184.78,50.17 186.06,51.43 187.96,51.43 188.59,52.07 v188.59,53.34 | 160.02,110.49 158.75,109.22 158.75,107.95 155.57,104.77 147.95,104.77 142.88,109.86 v131.44,109.86 | v45.08,43.82 36.19,43.82 | C25.1 51.44,41.91 53.34,43.82 v57.78,43.82 | 161.92,40.64 C52.2 | U10.1 55.24,50.17 v56.52,48.89 | v57.78,46.36 C26.2 | 161.92,40.64 172.09,40.64 C54.2 180.34,43.18 182.88,45.72 182.88,99.06 171.45,110.49 | C31.1 85.09,43.82 76.2,43.82 C29.1 | U11.1 67.94,50.17 66.67,48.89 v65.41,48.89 | v184.15,109.22 184.15,111.76 182.25,113.67 164.47,113.67 | 163.19,112.39 163.19,111.12 | 163.83,113.03 163.19,112.39 | C27.1 64.13,41.91 66.67,44.45 v70.48,44.45 | 164.47,113.67 163.83,113.03 | 162.56,113.03 163.19,112.39 | 162.56,113.03 163.83,113.03 | 161.92,113.67 162.56,113.03 | 161.92,113.67 164.47,113.67 | v123.82,109.86 130.81,102.87 156.21,102.87 160.66,107.32 | C28.2 69.85,46.36 v70.48,46.99 | 161.92,113.67 112.4,113.67 107.31,108.58 107.31,68.58 106.04,67.31 96.52,67.31 94.62,65.4 94.62,50.8 92.07,48.26 | C30.2 81.28,48.26 92.07,48.26 | v147.95,98.42 125.73,98.42 118.75,91.44 118.75,65.4 116.84,63.5 103.5,63.5 102.23,62.23 102.23,44.45 99.69,41.91 C31.2 92.07,41.27 90.81,40.01 79.38,40.01 | C32.2 92.07,48.26 | 79.38,40.01 C29.2 | v76.2,40.01 79.38,40.01 | v70.48,41.91 C27.2 64.77,40.01 v63.5,40.01 | v57.78,41.27 57.15,41.91 C25.2 52.07,40.01 v50.8,40.01 | v45.08,41.27 43.81,40.01 41.27,40.01 | C21.2 30.48,40.01 41.27,40.01
  Bottom 0.61: C23.2 41.27,40.01
  Bottom 1.27: v123.82,1.91 135.25,1.91 | 176.53,32.39 179.07,32.39 182.25,35.56 186.69,35.56 | 193.67,39.37 189.86,35.56 186.69,35.56 | 186.69,35.56 R45.1 | 196.22,49.53 194.95,49.53 | 196.22,49.53 196.22,17.78 | 196.22,49.53 196.22,64.77 193.67,67.31 188.59,67.31 187.33,68.58 187.33,102.23 184.78,104.77 v180.97,104.77
S$58
  Top 0.61: 43.18,112.39 43.18,120.02 40.64,122.55 13.97,122.55 10.8,119.38 10.8,62.23 7.62,59.05 7.62,52.07 R24.1
  Bottom 1.27: R28.2 10.16,52.07 7.62,52.07 R24.1
S$59
  Top 0.61: 38.73,105.41 38.73,104.77 | 38.73,105.41 38.73,109.22 | U9.10 U9.9 85.72,38.73 84.45,40.01 84.45,73.02 82.55,74.93 42.55,74.93 38.73,78.74 38.73,105.41
S$60
  Top 0.61: U11.10 U11.9 58.42,72.39 36.83,72.39 33.66,75.57 33.66,102.87 | 33.66,102.87 33.66,102.23 | 33.66,102.87 33.66,108.58
S$61  (1 unrouted)
  Top 0.61: 171.45,10.16 170.81,10.8 172.09,12.06 177.8,12.06 179.07,13.33 179.07,15.88 178.44,16.51 178.44,20.95 177.16,22.23 U20.2 | U20.3 173.99,24.77 172.09,26.67 172.09,30.48 170.18,32.39 U20.11
S$62
  Bottom 0.406: 76.84,36.83 74.29,39.37
  Bottom 0.61: U12.2 78.74,55.24 76.84,53.34 76.84,51.43 74.93,49.53 73.66,49.53 72.39,48.26 72.39,40.01 73.03,39.37 74.29,39.37 | 76.84,36.83 76.84,19.69 69.22,12.06 57.78,12.06 55.24,9.52
S$63
  Top 0.61: U16.10 U16.9 116.84,37.46 116.84,38.1 114.94,40.01 114.94,60.96 113.03,62.86 93.34,62.86 90.81,65.4 90.81,86.99 88.9,88.9 57.15,88.9 55.24,90.8 55.24,108.58
S$64
  Top 0.406: 56.83,111.12 56.83,106.36 56.52,106.05 | 116.2,33.65 119.38,33.65 | 110.49,23.49 114.3,23.49 | 102.87,23.49 106.68,23.49
  Top 0.61: 56.52,106.05 56.52,92.71 59.06,90.17 89.53,90.17 92.07,87.63 92.07,66.67 94.62,64.14 114.3,64.14 116.84,61.59 116.84,58.42 118.75,56.52 R35.2 116.2,50.8 116.2,40.64 117.47,39.37 118.75,39.37 120.01,38.1 120.01,34.29 119.38,33.65 | 116.2,33.65 114.94,32.39 114.94,24.13 114.3,23.49 | 106.68,23.49 110.49,23.49 | 102.87,23.49 102.23,22.86 102.23,18.41 105.41,15.24 118.75,15.24 120.01,13.97 120.01,9.52
  Top 1.27: 120.01,54.61 C49.2 | R35.2 120.01,54.61 | 120.01,54.61 119.38,54.61
S$65
  Top 0.61: U17.10 U17.9 130.17,39.37 129.54,40.01 129.54,50.8 127.63,52.7 127.63,63.5 125.73,65.4 96.52,65.4 93.34,68.58 93.34,88.9 90.81,91.44 60.96,91.44 58.42,93.98 58.42,109.22
S$66
  Top 0.406: 31.75,111.76 31.11,111.76 29.21,109.86 29.21,107.95
  Top 0.61: U4.10 U4.9 20.95,37.46 19.69,38.73 19.69,92.71 29.21,102.23 29.21,107.95
S$67  (via drill 1.27)
  Top 0.61: U7.10 U7.9 58.42,37.46 55.88,40.01 55.88,46.99 53.34,49.53 44.45,49.53 39.37,54.61 v39.37,62.23
  Bottom 0.61: v39.37,62.23 29.21,62.23 25.4,66.04 25.4,93.98 30.48,99.06 41.91,99.06 44.45,101.6 44.45,109.22
S$68
  Top 0.406: 53.97,106.05 53.97,111.76 | 109.85,33.65 114.3,33.65 | 102.87,33.65 106.68,33.65 | 115.57,8.25 121.28,8.25 122.56,9.52
  Top 0.61: 53.97,106.05 53.97,89.54 55.88,87.63 87.63,87.63 89.53,85.73 89.53,57.79 91.44,55.88 104.78,55.88 | 106.04,55.88 105.41,55.88 | 104.78,55.88 105.41,55.88 | 106.04,54.61 R34.2 106.04,53.98 104.78,55.88 | 106.04,54.61 106.04,55.88 | C48.2 113.66,52.07 113.66,39.37 114.94,38.1 114.94,34.29 114.3,33.65 | 106.68,33.65 109.85,33.65 | 102.87,33.65 100.97,31.75 100.97,17.14 105.41,13.33 110.49,13.33 115.57,8.25 | 105.41,55.88 105.41,55.24 106.04,54.61 | 106.04,55.88 106.68,55.24
  Top 1.27: C48.2 107.31,54.61 | 107.31,54.61 R34.2 | 107.31,54.61 106.68,54.61
S$69
  Top 1.27: 31.75,6.98 40,6.98
S$70
  Bottom 1.27: U14.2 191.14,45.08 189.23,46.99 R45.2 186.69,48.89 R46.1
S$72  (1 unrouted)
  Top 0.61: 131.44,10.16 131.44,10.8 132.72,12.06 137.79,12.06 139.06,13.33 139.06,15.88 137.79,17.14 136.53,17.14 133.98,19.69 133.98,20.95 135.25,22.23 U17.2 | U17.11 132.08,32.39 133.98,30.48 133.98,26.67 135.89,24.77 U17.3
S$73
  Top 1.27: R35.1 122.56,60.96 C49.1
S$74
  Top 1.27: C39.2 87,12.06 R29.2
  Bottom 1.27: R29.2 83.19,10.16 75.56,2.54 22.22,2.54 20.95,3.81 20.95,6.35
S$75
  Top 1.27: 23.49,6.98 29.21,6.98
S$78
  Top 0.61: U15.11 106.68,32.39 108.59,30.48 108.59,26.67 110.49,24.77 U15.3
S$81
  Top 0.61: U15.10 U15.9 99.69,37.46 97.79,39.37 97.79,50.17 94.62,53.34 89.53,53.34 87,55.88 87,80.01 80.65,86.36 54.61,86.36 52.7,88.27 52.7,109.22
S$82  (via drill 1.27 pad 1.42)
  Top 0.61: 127.63,22.23 127.63,21.59 | 127.63,22.23 R36.2 | v127.63,17.78 127.63,22.23
  Bottom 0.61: U17.1 133.98,19.69 131.44,17.14 127.63,17.14 | 127.63,17.14 v127.63,17.78 | 129.54,6.35 127,6.35 125.09,4.44 116.84,4.44 114.94,6.35 114.94,17.14 | 125.09,17.14 127.63,17.14 | 125.09,17.14 U16.1 | 114.94,17.14 113.66,17.14 112.4,18.41 U15.1 | 114.94,17.14 125.09,17.14
S$84  (via drill 1.27)
  Top 0.406: 55.88,65.4 57.15,66.67 67.94,66.67 | 80.65,66.67 67.94,66.67 | 67.94,66.67 U11.6 | 80.65,66.67 U12.6 | 82.55,66.67 80.65,66.67 | U9.6 92.71,32.39 91.44,33.65 83.19,33.65 80.65,33.65 | 67.94,33.65 80.65,33.65 | 55.24,33.65 67.94,33.65 | 55.24,33.65 42.55,33.65 | 42.55,33.65 31.75,33.65 30.48,32.39 | 42.55,33.65 U5.6 | U6.6 55.24,33.65 | 67.94,33.65 U7.6 | 80.65,33.65 U8.6
  Top 0.61: 82.55,66.67 83.19,66.04 83.19,33.65
  Bottom 0.61: U18.6 148.59,32.39 146.69,34.29 146.69,38.73 | v158.75,34.29 158.75,38.1 157.48,39.37 147.32,39.37 | 147.32,39.37 146.69,39.37 | 147.32,39.37 146.69,38.73 | 146.69,38.73 146.05,39.37 145.41,39.37 | 145.41,39.37 147.32,39.37 | 145.41,39.37 142.88,39.37 142.24,40.01 142.24,41.91 141.6,42.55 139.06,42.55 138.43,41.91 138.43,40.01 137.79,39.37 133.98,39.37 | U17.6 135.89,32.39 133.98,34.29 133.98,39.37 | U16.6 123.19,32.39 121.28,34.29 121.28,38.73 | 121.92,39.37 133.98,39.37 | 121.28,38.73 121.92,39.37 | U15.6 110.49,32.39 108.59,34.29 108.59,39.37 | 120.65,39.37 121.28,38.73 | 120.65,39.37 121.92,39.37 | 108.59,39.37 120.65,39.37 | 108.59,39.37 103.5,39.37 96.52,32.39 U9.6
S$85
  Bottom 0.61: 132.72,6.35 135.25,6.35
S$86
  Bottom 0.61: 172.72,6.35 175.26,6.35
  Bottom 1.27: 175.26,6.35 178.44,6.35 179.07,6.98 179.07,10.16 189.86,20.95 | 191.14,22.23 191.14,26.67 | 189.86,20.95 191.14,22.23 | R43.1 192.41,20.95 | 192.41,20.95 191.14,22.23 | 192.41,20.95 189.86,20.95
S$89
  Bottom 1.27: 135.25,6.98 135.25,1.91 172.72,1.91 173.99,3.17 173.99,5.72
S$95
  Top 0.61: U20.7 173.99,34.92 172.09,36.83 172.09,46.36 173.35,47.62 C55.2 | U19.7 161.29,34.92 160.02,36.2 160.02,46.36 161.29,47.62 C53.2 | 149.86,34.92 146.69,38.1 146.69,46.36 147.95,47.62 C51.2 | U17.7 135.89,34.92 133.98,36.83 133.98,46.36 135.25,47.62 C45.2 | U16.7 123.19,34.92 121.28,36.83 121.28,46.36 122.56,47.62 C43.2 | C41.2 109.85,47.62 108.59,46.36 108.59,36.83 110.49,34.92 U15.7
  Bottom 0.61: C55.2 174.62,49.53 161.92,49.53 | 161.92,49.53 C53.2 | 149.22,49.53 C51.2 | 149.22,49.53 161.92,49.53 | 149.22,49.53 144.78,49.53 143.51,50.8 137.16,50.8 136.53,50.17 | 136.53,50.17 C45.2 | 136.53,50.17 130.17,50.17 128.27,52.07 125.73,52.07 123.82,50.17 | 123.82,50.17 C43.2 | 123.82,50.17 113.66,50.17 C41.2
S$96
  Top 0.61: 60.96,109.22 60.96,95.89 62.87,93.98 106.68,93.98 109.22,91.44 109.22,70.48 111.12,68.58 139.06,68.58 140.97,66.67 140.97,55.88 142.24,54.61 142.24,39.37 142.88,38.73 U18.9 U18.10
S$97
  Top 0.61: U19.6 160.02,32.39 158.75,33.65
  Bottom 0.61: U19.6 164.47,32.39 165.73,33.65 165.73,38.73 166.37,39.37 170.81,39.37 172.09,38.1 172.09,34.29 173.99,32.39 U20.6
S$98
  Top 0.406: 59.69,106.36 59.69,111.12
S$99
  Top 0.61: 59.69,106.05 59.69,94.61 61.59,92.71 104.78,92.71 107.31,90.17 107.31,68.58 109.22,66.67 127.63,66.67 129.54,64.77 129.54,54.61 130.81,53.34 R38.2 | C56.2 138.43,52.7 138.43,40.64 140.34,38.73 140.34,17.14 144.78,12.7 167,12.7 168.28,11.43 168.28,10.16 168.91,9.52
  Top 1.27: R38.2 135.25,53.34 C56.2
S$101
  Top 0.61: U19.10 U19.9 155.57,38.73 153.03,41.27 153.03,70.48 151.13,72.39 114.94,72.39 113.03,74.3 113.03,94.61 111.12,96.52 64.77,96.52 63.5,97.79 63.5,108.58
S$108
  Top 0.61: U20.10 U20.9 168.28,40.01 165.73,42.55 165.73,73.66 163.19,76.2 118.75,76.2 116.84,78.11 116.84,97.15 114.94,99.06 68.58,99.06 66.67,100.96 66.67,109.22
S$109
  Top 0.406: 130.17,4.44 129.54,4.44 128.43,5.56 128.43,9.68 | 130.81,80.01 130.17,80.64
  Top 0.61: 69.22,109.22 69.22,102.87 70.48,101.6 118.75,101.6 120.65,99.7 120.65,84.45 R32.2 125.09,80.01 130.81,80.01 167,80.01 169.54,77.47 169.54,67.95 180.97,56.52 180.97,19.05 182.25,17.78 182.25,12.7 180.34,10.8 180.34,8.89 175.9,4.44 130.17,4.44
  Top 1.27: C46.2 127,81.92 R32.2 | C46.2 128.27,80.64 | C46.2 128.27,81.92 129.54,80.64
S$110
  Top 0.305: 177.8,8.25 161.29,8.25 160.02,9.52
  Top 0.406: 67.94,106.68 67.94,111.76
  Top 0.61: R41.2 168.91,53.34 167.64,54.61 167.64,75.57 165.1,78.11 120.65,78.11 118.75,80.01 118.75,98.42 116.84,100.33 69.22,100.33 67.94,101.6 67.94,106.68 | C59.2 179.7,49.53 179.7,17.78 180.34,17.14 180.34,12.7 179.07,11.43 179.07,9.52 177.8,8.25
  Top 1.27: C59.2 173.35,53.34 R41.2
S$111
  Top 1.27: 124.46,81.28 127.63,81.28
S$113
  Top 0.61: C54.1 C55.1 | C52.1 C53.1 | C51.1 C50.1
  Top 1.27: R32.1 127,89.54 C46.1 | R33.1 138.43,89.54 C47.1 | R34.1 109.85,60.96 C48.1 | R41.1 173.35,60.96 C59.1
  Bottom 0.61: 169.54,45.08 C54.1 | 156.84,45.08 C52.1 | 169.54,45.08 156.84,45.08 | 156.84,45.08 146.69,45.08 C51.1 | 169.54,45.08 178.44,45.08 180.34,46.99 180.34,94.61 167,107.95
  Bottom 1.27: R32.1 R33.1 148.59,89.54 167,107.95 165.73,106.68 165.73,71.76 163.83,69.85 142.24,69.85 140.34,67.95 140.34,60.96 | R34.1 140.34,60.96 | 140.34,60.96 R41.1
S$115
  Top 0.406: 125.57,9.52 125.57,3.97 126.37,3.17 127.48,3.17
S$116
  Top 1.27: 125.09,80.64 127.63,80.64
S$117
  Top 0.61: 71.75,109.22 71.75,104.77 73.66,102.87 129.54,102.87 131.44,100.96 131.44,83.82 133.35,81.92 R33.2 | C47.2 140.97,81.92 168.91,81.92 171.45,79.37 171.45,68.58 182.25,57.79 182.25,20.32 187.96,14.61 187.96,5.72 185.42,3.17 127.63,3.17
  Top 1.27: 138.43,81.92 R33.2 | C47.2 138.43,81.92 | 140.97,81.92 138.43,81.92
S$118
  Top 1.27: R38.1 135.25,60.96 C56.1
S$119
  Top 1.27: R39.1 147.95,60.96 C57.1
S$120
  Top 1.27: R40.1 160.66,60.96 C58.1
S$122  (1 unrouted)
  Top 0.61: 176.53,13.97 148.59,13.97 146.69,15.88 146.69,20.32 148.59,22.23 U18.2 | U18.11 144.78,32.39 146.69,30.48 146.69,26.67 148.59,24.77 U18.3
S$123  (1 unrouted)
  Top 0.61: 175.9,16.51 174.62,16.51 173.35,15.24 161.29,15.24 159.38,17.14 159.38,20.32 161.29,22.23 U19.2 | U19.11 157.48,32.39 159.38,30.48 159.38,26.67 161.29,24.77 U19.3

## Text on the board
Top: LC
Bottom: LS
tPlace: UFSC EXPERIMENT | CBEMG CPL FLUXRAD | SUPERIOR BOARD